# Altium PCB PCB_soldeerstation.PcbDoc
Units mil, origin at the board's own origin, x right, y up, seen from the top; angles counter-clockwise.
Board outline 5600 x 6050 mil, 2 copper layers (Top Layer, Bottom Layer); 76 components, 77 nets, 284 pads, 15 vias.
Unrouted connection lines stored in the file: 1.
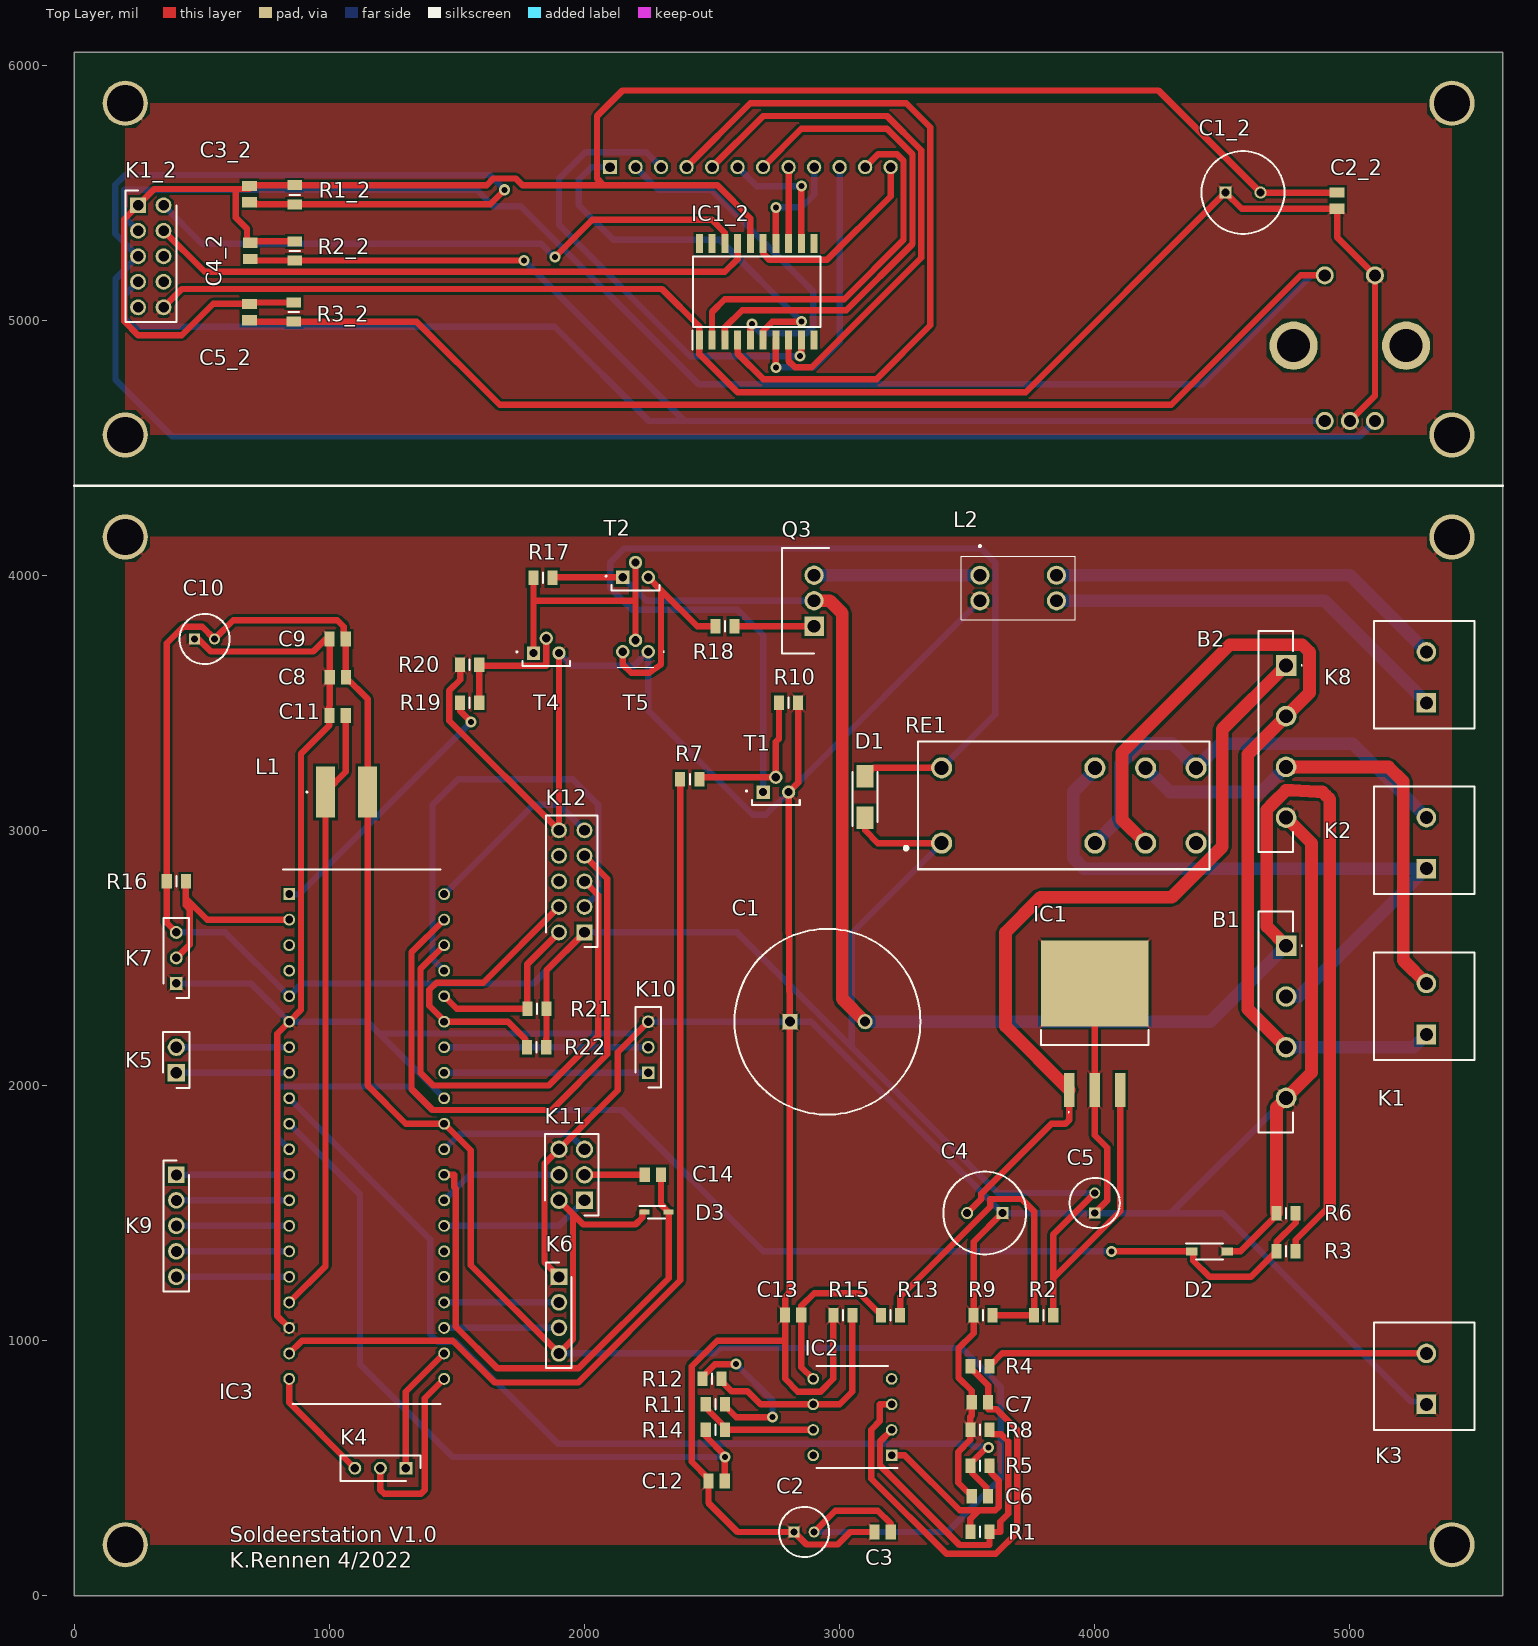
[diagram p0: Top Layer view]
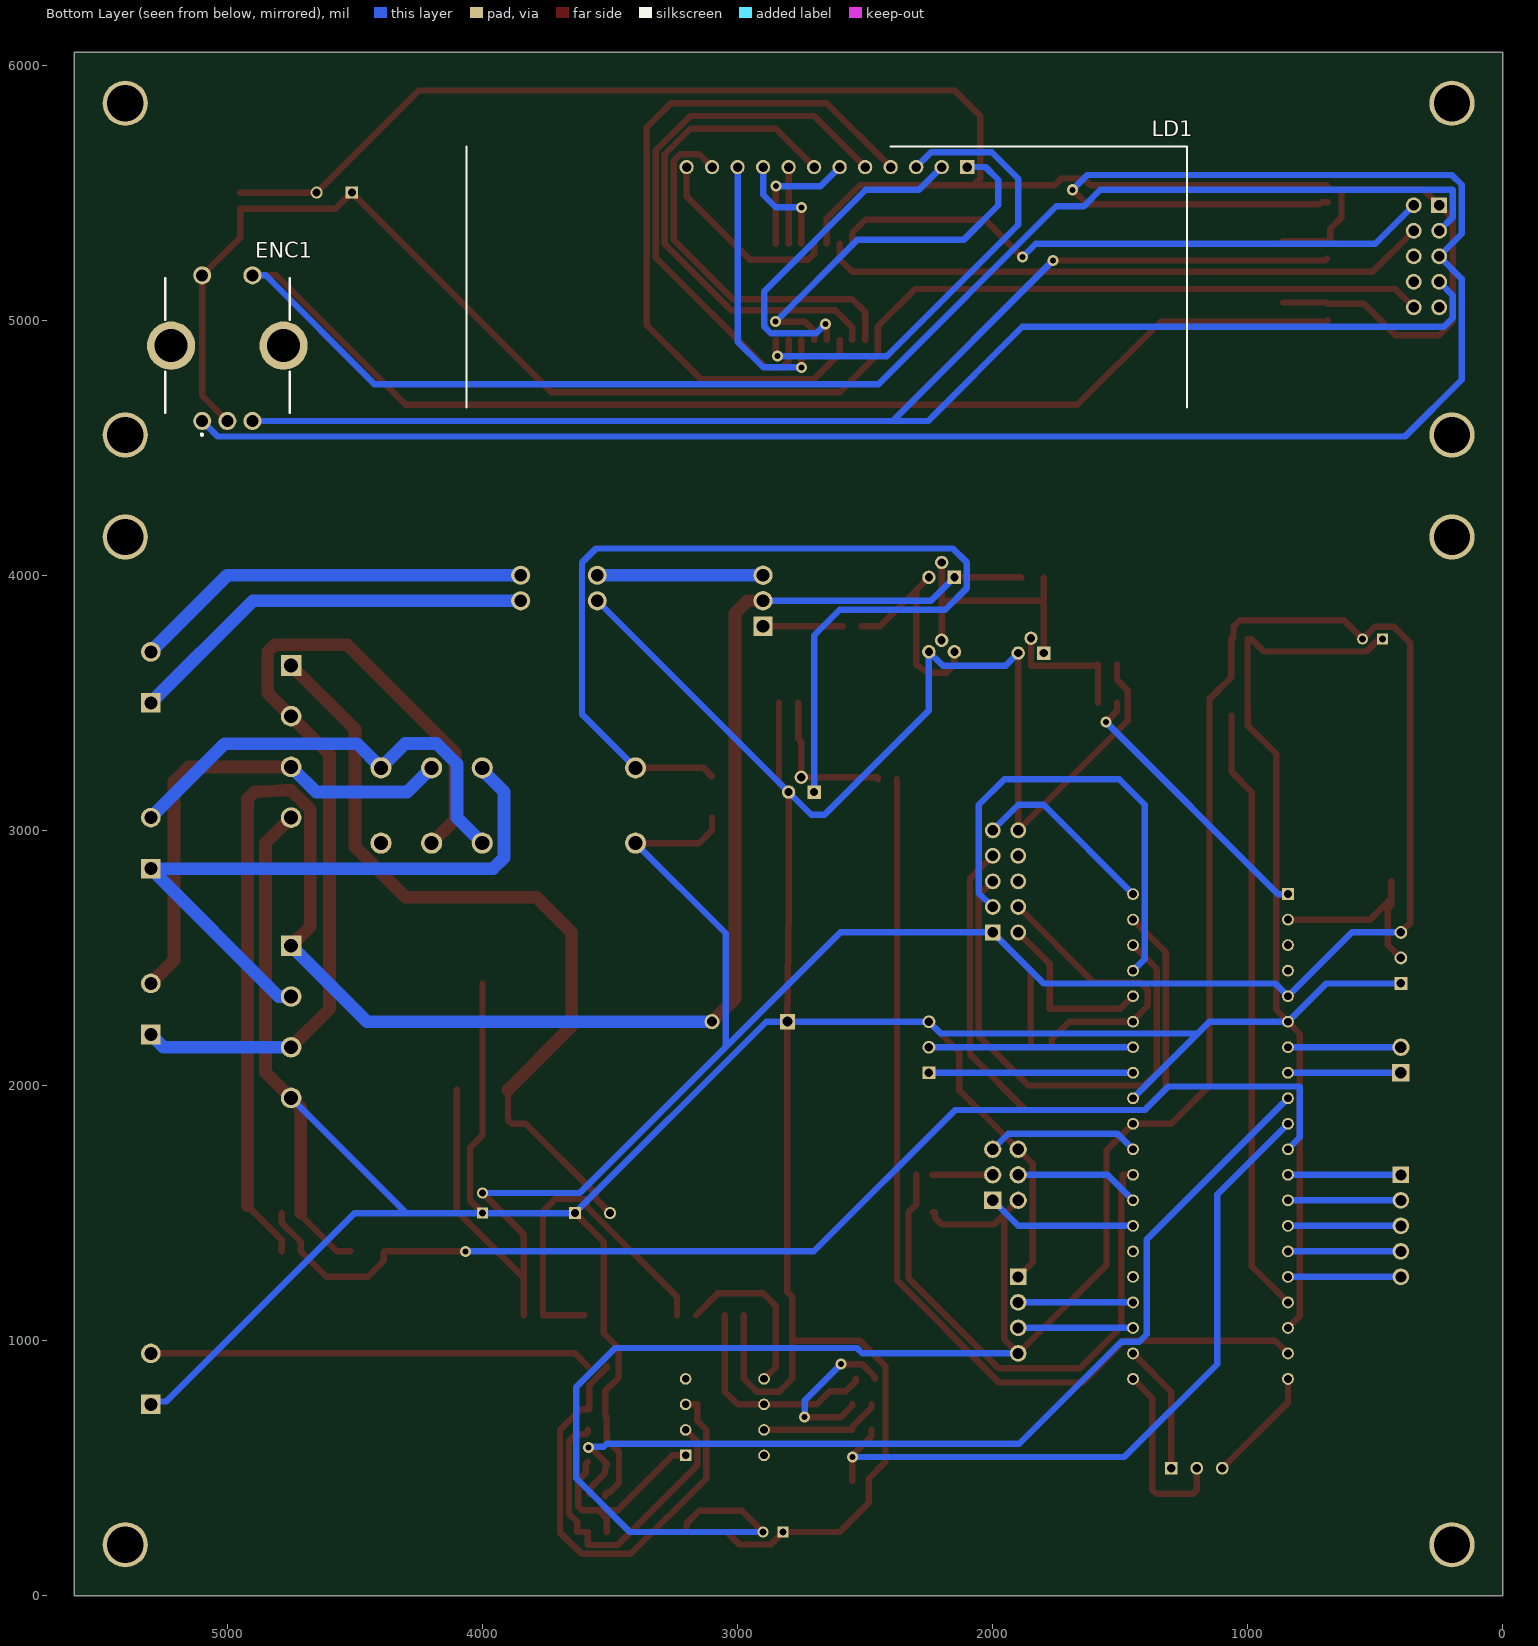
[diagram p1: Bottom Layer view, seen from below]
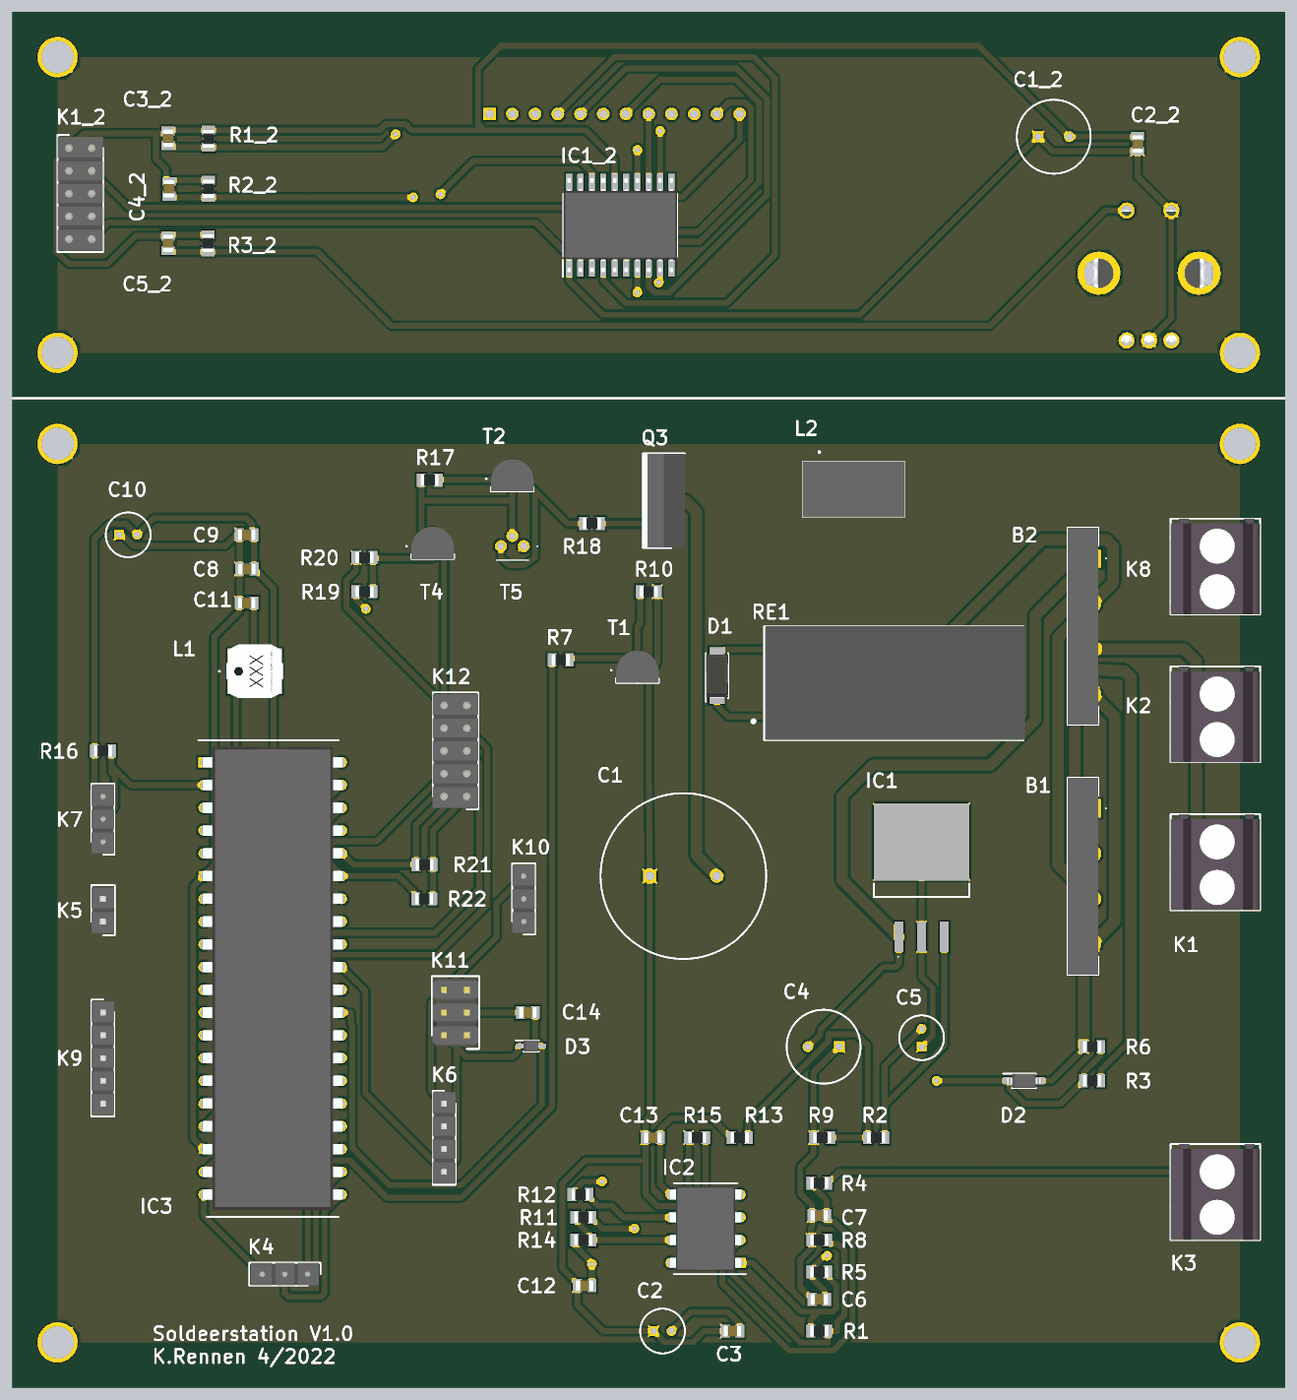
[diagram p2: 3D render of the assembled board from above, using the file's embedded part models]

## Layer stack, top to bottom
Top Solder: solder mask 0.4, Solder Resist, Dk 3.5
Top Layer: signal copper 1.4
Dielectric 1: dielectric 12.6, FR-4, Dk 4.8
Bottom Layer: signal copper 1.4
Bottom Solder: solder mask 0.4, Solder Resist, Dk 3.5

## Board outline
0,0 0,6050 5600,6050 5600,0

## Design rules (kind name [scope] priority, off if disabled: settings)
Clearance [All] p1: gap=10 ignorepadtopadclearanceinfootprint=FALSE except(0: Arc-Hole Track-Hole SMDPad-Hole THPad-Hole Via-Hole Fill-Hole Poly-Hole Region-Hole Text-Hole)
Height [All] p1 off: minheight=0 maxheight=1000 prefheight=500
PolygonConnect [All] p1: connectstyle=Relief reliefconductorwidth=10 reliefentries=4 polygonreliefangle="45 Angle" airgapwidth=10
RoutingVias [All] p1: holewidth=23.62 width=43.31 viastyle="Through Hole" minholewidth=23.62 minwidth=43.31 maxholewidth=23.62 maxwidth=43.31
SolderMaskExpansion [All] p1: expansion=4 istentingtop=FALSE
Width [All] p1: maxlimit=50 minlimit=25 preferedwidth=25 minimp=50.000000 maximp=50.000000 favimp=50.000000
29 further rules are at their usual default settings.

## Components (designator, comment, footprint, x,y, rotation, side; value= is the part's Value field where it differs from the comment)
B1 "bruggelijkrichter" GBU606G 4750,2547.64 r90 top
B2 "bruggelijkrichter" GBU606G 4750,3646.46 r90 top
C1 "4700uF" 4700uf 2804.72,2250 r0 top
C1_2 "100uF" 100uf 4512.2,5500 r0 top
C2 "10uF" 10uf 2821.26,250 r0 top
C2_2 "100nF" 100nF 4950,5468.11 r90 top
C3 "100nF" 100nF 3168.11,250 r0 top
C3_2 "10nF" 10nF 686.56,5493.49 r90 top
C4 "100uF" 100uf 3637.8,1500 r180 top
C4_2 "10nF" 10nF 690.21,5271.07 r90 top
C5 "10uF" 10uf 4000,1500 r90 top
C5_2 "10nF" 10nF 686.56,5031.65 r90 top
C6 "10nF" 10nF 3550,389.6 r0 top
C7 "10nF" 10nF 3550,758.24 r0 top
C8 "100nF" 100nF 1032.95,3600.11 r0 top
C9 "100nF" 100nF 1031.89,3750 r0 top
C10 "10uF" 10uf 471.26,3750 r0 top
C11 "100nF" 100nF 1031.89,3450 r0 top
C12 "10nF" 10nF 2518.11,450 r0 top
C13 "10nF" 10nF 2818.11,1100 r0 top
C14 "100nF" 100nF 2268.11,1650 r0 top
D1 "FM4007W-W" fm4007 3100,3130.71 r90 top
D2 "MMSZ4689T1G zener" mmsz4 4450,1350 r0 top
D3 "SMMDL914T1G" smmdl914 2282.75,1503.28 r0 top
ENC1 "PEC11R-4225F-S0024 encoder" PEC11R-4225F-S0024 5000,4900 r180 bottom
IC1 "TL780-05CKTTR" TL78005CKTTR 4000,2248.23 r0 top net-tie
IC1_2 "TM1637" tm1637 2675,5111.02 r90 top
IC2 "MCP6002-E_P dual opamp" mcp6002 3050,700 r180 top
IC3 "ATMEGA4809-PF" ATMEGA4809-PF 1146.26,1800 r0 top
K1 "schroefconnector" schroefconnector 5300,2200 r90 top
K1_2 "10 boxheader" 10BoxHeader 250,5450 r270 top
K2 "schroefconnector" schroefconnector 5300,2850 r90 top
K3 "schroefconnector" schroefconnector 5300,750 r90 top
K4 "1x3header" HDR1X3 1300,500 r180 top
K5 "1x2header" HDR1X2 400,2050 r90 top
K6 "1x4header" HDR1X4 1900,1250 r270 top
K7 "1x3header" HDR1X3 400,2400 r90 top
K8 "schroefconnector" schroefconnector 5300,3500 r90 top
K9 "1x5header" HDR1X5 400,1650 r270 top
K10 "1x3header" HDR1X3 2250,2050 r90 top
K11 "2x3header" HDR2X3 2000,1550 r90 top
K12 "10 boxheader" 10BoxHeader 2000,2600 r90 top
L1 "smoorspoel" smoorspoel 1067.32,3150 r0 top
L2 "cmsmoorspoel" CMsmoorspoel 3550,4000 r270 top
LD1 "KW4-804CVB" kw4 2400,5600 r270 bottom
Q3 "IRF9Z34NPBF" irf9z34npbf 2900,3800 r90 top
R1 "18k" 18k 3550,250 r0 top
R1_2 "10k" 10k 863.73,5491.39 r90 top
R2 "1M" 1M 3800,1100 r0 top
R2_2 "10k" 10k 863.73,5271.07 r90 top
R3 "68k" 68k 4750,1350 r0 top
R3_2 "10k" 10k 861.02,5031.65 r90 top
R4 "5k6" 5k6 3550,900 r0 top
R5 "5k6" 5k6 3550,509.3 r0 top
R6 "10k" 10k 4750,1500 r0 top
R7 "10k" 10k 2412.6,3200 r0 top
R8 "100E" 100ohm 3550,650 r0 top
R9 "10M" 10M 3562.6,1100 r0 top
R10 "4k7" 4k7 2800,3500 r0 top
R11 "18k" 18k 2512.6,750 r0 top
R12 "18k" 18k 2500,850 r0 top
R13 "5k6" 5k6 3200,1100 r0 top
R14 "5k6" 5k6 2512.6,650 r0 top
R15 "100E" 100ohm 3012.6,1100 r0 top
R16 "4k7" 4k7 400,2800 r180 top
R17 "4k7" 4k7 1836.64,3990.28 r0 top
R18 "100E" 100ohm 2550,3800 r0 top
R19 "10k" 10k 1550,3500 r0 top
R20 "4k7" 4k7 1550,3650 r0 top
R21 "4k7" 4k7 1813.74,2300.36 r0 top
R22 "4k7" 4k7 1812.6,2150 r0 top
RE1 "RT424005 relais" RT42005 3400,3097.64 r0 top
T1 "BC547" BC547CBU 2700,3155 r0 top
T2 "BC547" BC547CBU 2150,3996.85 r0 top
T4 "BC547" BC547CBU 1800,3700 r0 top
T5 "BC557" BC557C 2250,3700 r180 top

## Footprints (in the part's own frame and the unit in brackets; to place one, negate y for a bottom-side part, rotate by r counter-clockwise, add the part's x,y. Pads: shape width x height; smd on the part's side, far side on the other; paste and mask are expansions set on the pad)
1M [mm]
  rect 1x1.45 smd: 1(-0.95,0) 2(0.95,0)
  silkscreen extent 0,-0.53 0,0.53, body extent -1,-0.63 1,0.63, height 0.65
4k7 [mm]
  rect 1x1.45 smd: 1(-0.95,0) 2(0.95,0)
  silkscreen extent 0,-0.53 0,0.53, body extent -1,-0.63 1,0.63, height 0.65
5k6 [mm]
  rect 1x1.45 smd: 1(-0.95,0) 2(0.95,0)
  silkscreen extent 0,-0.53 0,0.53, body extent -1,-0.63 1,0.63, height 0.65
10BoxHeader [mm]
  rect 1.575x1.575 hole 1.05: 1(0,0)
  round 1.575 hole 1.05: 2(0,2.54) 3(2.54,0) 4(2.54,2.54) 5(5.08,0) 6(5.08,2.54) 7(7.62,0) 8(7.62,2.54) 9(10.16,0) 10(10.16,2.54)
  silkscreen extent -1.46,-1.27 11.62,3.81, body extent -1.27,-1.27 11.43,3.81, height 8.64
10k [mm]
  rect 1x1.45 smd: 1(-0.95,0) 2(0.95,0)
  silkscreen extent 0,-0.52 0,0.52, body extent -1,-0.63 1,0.63, height 0.65
10M [mm]
  rect 1x1.45 smd: 1(-0.95,0) 2(0.95,0)
  silkscreen extent 0,-0.53 0,0.53, body extent -1,-0.63 1,0.63, height 0.65
10nF [mm]
  rect 1.02x1.47 smd: 1(-0.81,0) 2(0.81,0)
  body extent -1,-0.63 1,0.63, height 0.94
10uf [mm]
  rect 1.1x1.1 hole 0.7: 1(0,0)
  round 1.1 hole 0.7: 2(2,0)
  silkscreen extent -1.5,-2.5 3.5,2.5
18k [mm]
  rect 1x1.45 smd: 1(-0.95,0) 2(0.95,0)
  silkscreen extent 0,-0.53 0,0.53, body extent -1,-0.63 1,0.63, height 0.65
68k [mm]
  rect 1x1.45 smd: 1(-0.95,0) 2(0.95,0)
  silkscreen extent 0,-0.53 0,0.53, body extent -1,-0.63 1,0.63, height 0.65
100nF [mm]
  rect 1.02x1.47 smd: 1(-0.81,0) 2(0.81,0)
  body extent -1,-0.63 1,0.63, height 0.94
100ohm [mm]
  rect 1x1.45 smd: 1(-0.95,0) 2(0.95,0)
  silkscreen extent 0,-0.53 0,0.53, body extent -1,-0.63 1,0.63, height 0.65
100uf [mm]
  rect 1.2x1.2 hole 0.8: 1(0,0)
  round 1.2 hole 0.8: 2(3.5,0)
  silkscreen extent -2.38,-4.12 5.87,4.12
4700uf [mm]
  rect 1.5x1.5 hole 1: 1(0,0)
  round 1.5 hole 1: 2(7.5,0)
  silkscreen extent -5.5,-9.25 13,9.25
ATMEGA4809-PF [mm]
  rect 1.184x1.184 hole 0.784: 1(-7.715,24.13)
  round 1.184 hole 0.784: 2(-7.715,21.59) 3(-7.715,19.05) 4(-7.715,16.51) 5(-7.715,13.97) 6(-7.715,11.43) 7(-7.715,8.89) 8(-7.715,6.35) 9(-7.715,3.81) 10(-7.715,1.27) 11(-7.715,-1.27) 12(-7.715,-3.81) 13(-7.715,-6.35) 14(-7.715,-8.89) 15(-7.715,-11.43) 16(-7.715,-13.97) 17(-7.715,-16.51) 18(-7.715,-19.05) 19(-7.715,-21.59) 20(-7.715,-24.13) 21(7.715,-24.13) 22(7.715,-21.59) 23(7.715,-19.05) 24(7.715,-16.51) 25(7.715,-13.97) 26(7.715,-11.43) 27(7.715,-8.89) 28(7.715,-6.35) 29(7.715,-3.81) 30(7.715,-1.27) 31(7.715,1.27) 32(7.715,3.81) 33(7.715,6.35) 34(7.715,8.89) 35(7.715,11.43) 36(7.715,13.97) 37(7.715,16.51) 38(7.715,19.05) 39(7.715,21.59) 40(7.715,24.13)
  silkscreen extent -8.31,-26.61 7.37,26.61, body extent -7.86,-25.88 7.86,25.88, height 6.35
BC547CBU [mm]
  rect 1.333x1.333 hole 0.82: 1(0,-0.127)
  round 1.333 hole 0.82: 2(1.27,1.35) 3(2.54,-0.127)
  silkscreen extent -1.7,-1.43 3.65,0.05, body extent -1.11,-1.43 3.65,2.19, height 5.43
BC557C [mm]
  round 1.35 hole 0.81: 1(0,0) 2(1.27,-1.143) 3(2.54,0)
  silkscreen extent -1.6,-0.05 3.07,1.55
CMsmoorspoel [mil]
  round 75 hole 50: 1(0,0) 2(100,0) 3(100,300) 4(0,300)
  silkscreen extent -118,-74 174,374, body extent -74,-74 174,374, height 378
fm4007 [mm]
  rect 2.25x1.7 smd: 1(-2.05,0) 2(2.05,0)
  silkscreen extent -2.9,-1.24 2.5,1.24, body extent -2.5,-1.24 2.5,1.24, height 2.31
GBU606G [mm]
  rect 2.055x2.055 hole 1.37: 1(0,0)
  round 2.055 hole 1.37: 2(-5.05,0) 3(-10.1,0) 4(-15.15,0)
  silkscreen extent -18.58,-1.6 3.42,2.75, body extent -18.57,-0.69 3.43,2.76, height 21.05
HDR1X2 [mm]
  rect 1.725x1.725 hole 1.15: 1(0,0)
  round 1.725 hole 1.15: 2(2.54,0)
  silkscreen extent -1.52,-1.32 4.06,1.32, body extent -1.27,-1.27 3.81,1.27, height 8.74
HDR1X3 [mm]
  rect 1.275x1.275 hole 0.85: 1(0,0)
  round 1.275 hole 0.85: 2(2.54,0) 3(5.08,0)
  silkscreen extent -1.45,-1.27 6.53,1.27, body extent -1.27,-1.27 6.35,1.27, height 8.64
HDR1X4 [mm]
  rect 1.65x1.65 hole 1.1: 1(0,0)
  round 1.65 hole 1.1: 2(2.54,0) 3(5.08,0) 4(7.62,0)
  silkscreen extent -1.45,-1.27 9.07,1.27, body extent -1.27,-1.27 8.89,1.27, height 8.34
HDR1X5 [mm]
  rect 1.65x1.65 hole 1.1: 1(0,0)
  round 1.65 hole 1.1: 2(2.54,0) 3(5.08,0) 4(7.62,0) 5(10.16,0)
  silkscreen extent -1.45,-1.27 11.61,1.27, body extent -1.27,-1.27 11.43,1.27, height 8.64
HDR2X3 [mm]
  rect 1.725x1.725 hole 1.15: 1(0,0)
  round 1.725 hole 1.15: 2(0,2.54) 3(2.54,0) 4(2.54,2.54) 5(5.08,0) 6(5.08,2.54)
  silkscreen extent -1.52,-1.37 6.6,3.91, body extent -1.27,-1.27 6.35,3.81, height 8.38
irf9z34npbf [mm]
  rect 1.92x1.92 hole 1.28: 1(0,0)
  round 1.92 hole 1.28: 2(2.54,0) 3(5.08,0)
  silkscreen extent -2.73,-1.49 7.81,3.2, body extent -2.67,-1.5 7.75,3.19, height 18.84
kw4 [mm]
  rect 1.425x1.425 hole 0.95: 1(0,7.62)
  round 1.425 hole 0.95: 2(0,5.08) 3(0,2.54) 4(0,0) 5(0,-2.54) 6(0,-5.08) 7(0,-7.62) 8(0,-10.16) 9(0,-12.7) 10(0,-15.24) 11(0,-17.78) 12(0,-20.32)
  silkscreen extent -2.02,-42.23 23.93,29.53
mcp6002 [mm]
  rect 1.158x1.158 hole 0.758: 1(-3.905,3.81)
  round 1.158 hole 0.758: 2(-3.905,1.27) 3(-3.905,-1.27) 4(-3.905,-3.81) 5(3.905,-3.81) 6(3.905,-1.27) 7(3.905,1.27) 8(3.905,3.81)
  silkscreen extent -4.48,-5.08 3.56,5.08, body extent -4.04,-4.75 4.04,4.75, height 5.33
mmsz4 [mm]
  rect 1.15x0.8 smd: 1(-1.75,0) 2(1.75,0)
  silkscreen extent -2.33,-0.8 1.34,0.8, body extent -1.86,-0.8 1.86,0.8, height 1.35
PEC11R-4225F-S0024 [mm]
  round 1.8 hole 1.2: 1(-2.5,-7.5) 2(2.5,-7.5) 3(0,-7.5) 4(-2.5,7) 5(2.5,7)
  round 4.8 hole 3.28: 6(5.6,0) 7(-5.6,0)
  silkscreen extent -6.2,-8.95 6.2,6.7, body extent -7,-7.75 6.99,7.15, height 31.51
RT42005 [mm]
  round 2.1 hole 1.4: 1(0,-3.75) 2(15.26,-3.75) 3(20.3,-3.75) 4(25.34,-3.75) 5(25.34,3.75) 6(20.3,3.75) 7(15.26,3.75) 8(0,3.75)
  silkscreen extent -3.67,-6.35 26.65,6.35, body extent -2.21,-6.35 26.79,6.35, height 15.86
schroefconnector [mm]
  rect 1.95x1.95 hole 1.3: 1(0,0)
  round 1.95 hole 1.3: 2(5.08,0)
  silkscreen extent -2.54,-4.8 8.17,5.2, body extent -2.54,-4.8 8.17,5.2, height 13.8
smmdl914 [mm]
  rect 1x0.5 smd: 1(-1.2,0) 2(1.2,0)
  silkscreen extent -1.7,-0.62 0.85,0.63, body extent -1.25,-0.63 1.25,0.63, height 1.1
smoorspoel [mm]
  rect 1.9x5.1 smd: 1(-2.1,0) 2(2.1,0)
  silkscreen extent -4,-0.05 -3.9,0.05, body extent -3.15,-3 3.15,3, height 4.5
TL78005CKTTR [mm]
  rect 1x3.4 smd: 1(-2.54,-6.745) 2(0,-6.745) 3(2.54,-6.745)
  rect 10.7x8.6 smd: 4(0,3.855)
  silkscreen extent -5.33,-9 5.33,-0.8
tm1637 [mm]
  rect 1.9x0.7 smd: 1(-4.8,5.715) 2(-4.8,4.445) 3(-4.8,3.175) 4(-4.8,1.905) 5(-4.8,0.635) 6(-4.8,-0.635) 7(-4.8,-1.905) 8(-4.8,-3.175) 9(-4.8,-4.445) 10(-4.8,-5.715) 11(4.8,-5.715) 12(4.8,-4.445) 13(4.8,-3.175) 14(4.8,-1.905) 15(4.8,-0.635) 16(4.8,0.635) 17(4.8,1.905) 18(4.8,3.175) 19(4.8,4.445) 20(4.8,5.715)
  silkscreen extent -5.75,-6.35 3.5,6.42, body extent -5.23,-6.35 5.23,6.35, height 2.8

## Part data
B1 B2: "Bridge Rectifier GBU606-G", Manufacturer_Name="Comchip Technology", Manufacturer_Part_Number=GBU606-G, Datasheet Link=https://www.comchiptech.com/product.php?id=2217, Height=20.95mm
C1: "Capacitor Polarised 50PK4700MEFC18X40", Manufacturer_Name=Rubycon, Manufacturer_Part_Number=50PK4700MEFC18X40, Mouser2 Part Number=232-50PK4700MEFC18X4, Datasheet Link=https://componentsearchengine.com//50PK4700MEFC18X40.pdf, Height=41.5mm, Mouser2 Price/Stock=https://www.mouser.com/Search/Refine.aspx?Keyword=232-50PK4700MEFC18X4
C1_2 C4: "Capacitor Polarised RGA101M1HBK-0811G", Manufacturer_Name=Lelon, Manufacturer_Part_Number=RGA101M1HBK-0811G, Datasheet Link=https://www.arrow.com/en/products/rga101m1hbk-0811g/lelon-electronics, Height=13mm
C2 C5 C10: "Capacitor Polarised 860020672010", Manufacturer_Name="Wurth Elektronik", Manufacturer_Part_Number=860020672010, Mouser2 Part Number=710-860020672010, Datasheet Link=https://componentsearchengine.com//860020672010.pdf, Height=12.5mm, Mouser2 Price/Stock=https://www.mouser.com/Search/Refine.aspx?Keyword=710-860020672010
C2_2 C3 C3_2 C4_2 C5_2 C6 C7 C8 C9 C11 C12 C13 C14: "Capacitor", Manufacturer_Name=AVX, Manufacturer_Part_Number=0402YC104MAT2A, Mouser Part Number=581-0402YC104MAT2A, Datasheet Link=http://www.mouser.com/catalog/supplier/library/pdf/AVXSurfaceMountCeramic.pdf, Height=0.56mm, Mouser Price/Stock=https://www.mouser.co.uk/ProductDetail/AVX/0402YC104MAT2A?qs=O2%2FeDh0sX9yiCaLwpXy1bw%3D%3D
D1: "Bridge Rectifier", Manufacturer_Name=Rectron, Mouser2 Part Number=583-FM4007W-W, Datasheet Link=https://componentsearchengine.com//FM4007W-W.pdf, Height=2.31mm, Manufacturer_Part_Number=FM4007W-W, Mouser2 Price/Stock=https://www.mouser.com/Search/Refine.aspx?Keyword=583-FM4007W-W
D2: "Zener Diode", Manufacturer_Name="ON Semiconductor", Manufacturer_Part_Number=MMSZ4689T1G, Mouser2 Part Number=863-MMSZ4689T1G, Datasheet Link=https://componentsearchengine.com//MMSZ4689T1G.pdf, Height=1.35mm, Mouser2 Price/Stock=https://www.mouser.com/Search/Refine.aspx?Keyword=863-MMSZ4689T1G
D3: "Diode SMMDL914T1G", Manufacturer_Name="ON Semiconductor", Mouser2 Part Number=863-SMMDL914T1G, Datasheet Link=https://componentsearchengine.com//SMMDL914T1G.pdf, Height=1.1mm, Manufacturer_Part_Number=SMMDL914T1G, Mouser2 Price/Stock=https://www.mouser.com/Search/Refine.aspx?Keyword=863-SMMDL914T1G
ENC1: "draai encoder met drukknop", Arrow Part Number=PEC11R-4225F-S0024, Manufacturer_Name=Bourns, Mouser Part Number=652-PEC11R-4225F-S24, Arrow Price/Stock=https://www.arrow.com/en/products/pec11r-4225f-s0024/bourns?region=nac, Datasheet Link=https://componentsearchengine.com/Datasheets/1/PEC11R-4225F-S0024.pdf, Manufacturer_Part_Number=PEC11R-4225F-S0024, Mouser Price/Stock=https://www.mouser.co.uk/ProductDetail/Bourns/PEC11R-4225F-S0024?qs=Zq5ylnUbLm4N6UNkPX3pkQ%3D%3D
IC1: "Integrated Circuit spanningsregelaar", Manufacturer_Name="Texas Instruments", Datasheet Link=http://www.ti.com/general/docs/suppproductinfo.tsp?distId=26&gotoUrl=http%3A%2F%2Fwww.ti.com%2Flit%2Fgpn%2Ftl780, Height=5.08mm, Manufacturer_Part_Number=TL780-05CKTTR
IC1_2: library part TM1637__SOP_, "Integrated Circuit", Manufacturer_Name="TITAN MICRO ELECTRONICS", Manufacturer_Part_Number="TM1637 (SOP)", Datasheet Link=https://www.mcielectronics.cl/website_MCI/static/documents/Datasheet_TM1637.pdf, Height=2.8mm
IC2: "Integrated Circuit", Manufacturer_Name=Microchip, Manufacturer_Part_Number=MCP6002-E/P, Mouser2 Part Number=579-MCP6002-E/P, Datasheet Link=https://componentsearchengine.com//MCP6002-E_P.pdf, Height=5.334mm, Mouser2 Price/Stock=https://www.mouser.com/Search/Refine.aspx?Keyword=579-MCP6002-E%2FP
IC3: "Integrated Circuit", Manufacturer_Name=Microchip, Mouser Part Number=556-ATMEGA4809-PF, Datasheet Link=http://ww1.microchip.com/downloads/en/DeviceDoc/40-pin-Data-Sheet-megaAVR-0-series-DS40002104A.pdf, Height=6.35mm, Manufacturer_Part_Number=ATMEGA4809-PF, Mouser Price/Stock=https://www.mouser.co.uk/ProductDetail/Microchip-Technology-Atmel/ATMEGA4809-PF?qs=T3oQrply3y9UlpZbCygk%252BQ%3D%3D
K1 K2 K3 K8: "Connector 1716020000", Manufacturer_Name=Weidmuller, Manufacturer_Part_Number=1716020000, Datasheet Link=https://catalog.weidmueller.com/catalog/Start.do?ObjectID=1716020000&_ga=2.21797499.1716783809.1613378202-511725545.1613378202
K1_2 K12: "Connector", Arrow Part Number=0010897100, Manufacturer_Name=Molex, Mouser Part Number=N/A, Arrow Price/Stock=https://www.arrow.com/en/products/0010897100/molex?region=nac, Datasheet Link=http://www.molex.com/pdm_docs/sd/010897100_sd.pdf, Height=8.64mm, Manufacturer_Part_Number=0010897100, Mouser Price/Stock=https://www.mouser.co.uk/ProductDetail/Molex/0010897100?qs=PBcRNPEHKsqIDCZzUxhahw%3D%3D
K4 K7 K10: "Connector", Arrow Part Number=0022035035, Manufacturer_Name=Molex, Mouser Part Number=N/A, Arrow Price/Stock=https://www.arrow.com/en/products/0022035035/molex, Datasheet Link=https://www.molex.com/pdm_docs/sd/022035035_sd.pdf, Height=6.1mm, Manufacturer_Part_Number=0022035035, Mouser Price/Stock=https://www.mouser.co.uk/ProductDetail/Molex/0022035035?qs=PBcRNPEHKsp8%252BOnk6fhZPA%3D%3D
K5: "Connector", Arrow Part Number=0022232021, Manufacturer_Name=Molex, Mouser Part Number=N/A, Arrow Price/Stock=https://www.arrow.com/en/products/0022232021/molex?region=europe, Datasheet Link=https://www.molex.com/webdocs/datasheets/pdf/en-us//0022232021_PCB_HEADERS.pdf, Height=11.05mm, Manufacturer_Part_Number=0022232021, Mouser Price/Stock=https://www.mouser.co.uk/ProductDetail/Molex/0022232021?qs=PBcRNPEHKspVhuxYRaP9bQ%3D%3D
K6: "Connector", Arrow Part Number=0009652048, Manufacturer_Name=Molex, Mouser Part Number=N/A, Arrow Price/Stock=https://www.arrow.com/en/products/0009652048/molex?region=europe, Datasheet Link=https://www.molex.com/pdm_docs/sd/009652048_sd.pdf, Height=14.25mm, Manufacturer_Part_Number=0009652048, Mouser Price/Stock=https://www.mouser.co.uk/ProductDetail/Molex/0009652048?qs=PBcRNPEHKsr%252BMEGD33m%2F9w%3D%3D
K9: "Connector", Arrow Part Number=0353620550, Manufacturer_Name=Molex, Mouser Part Number=N/A, Arrow Price/Stock=https://www.arrow.com/en/products/0353620550/molex, Datasheet Link=https://www.molex.com/pdm_docs/sd/353620550_sd.pdf, Height=8.5mm, Manufacturer_Part_Number=0353620550, Mouser Price/Stock=https://www.mouser.com/Search/Refine.aspx?Keyword=N%2FA
K11: "Connector", Arrow Part Number=10129381-906002BLF, Manufacturer_Name=Amphenol, Mouser Part Number=649-1012938190602BLF, Arrow Price/Stock=https://www.arrow.com/en/products/10129381-906002blf/amphenol-fci?region=europe, Datasheet Link=https://componentsearchengine.com/Datasheets/1/10129381-906002BLF.pdf, Height=8.58mm, Manufacturer_Part_Number=10129381-906002BLF, Mouser Price/Stock=https://www.mouser.co.uk/ProductDetail/Amphenol-FCI/10129381-906002BLF?qs=DXv0QSHKF4zSKXKyBbBVMw%3D%3D
L1: "Inductor VLS6045EX-100M-H", Manufacturer_Name=TDK, Manufacturer_Part_Number=VLS6045EX-100M-H, Mouser2 Part Number=810-VLS6045EX-100M-H, Datasheet Link=https://componentsearchengine.com//VLS6045EX-100M-H.pdf, Mouser2 Price/Stock=https://www.mouser.com/Search/Refine.aspx?Keyword=810-VLS6045EX-100M-H
L2: "Transformer CM2545X171B-10", Manufacturer_Name="Laird Technologies", Manufacturer_Part_Number=CM2545X171B-10, Datasheet Link=https://datasheet.datasheetarchive.com/originals/dk/DKDS-7/122753.pdf, Height=9.5mm
LD1: "Display", Manufacturer_Name=Luckylight, Datasheet Link=https://www.tme.eu/Document/21b6c1f82a45ad996bb1bfe0c31af292/KW4-804XVB.pdf, Height=7.75mm, Manufacturer_Part_Number=KW4-804CVB
Q3: "MOSFET (P-Channel)", Manufacturer_Name=Infineon, Mouser2 Part Number=942-IRF9Z34NPBF, Datasheet Link=https://componentsearchengine.com//IRF9Z34NPBF.pdf, Height=4.69mm, Manufacturer_Part_Number=IRF9Z34NPBF, Mouser2 Price/Stock=https://www.mouser.com/Search/Refine.aspx?Keyword=942-IRF9Z34NPBF
R1 R1_2 R2 R2_2 R3 R3_2 R4 R5 R6 R7 R9 R10 R11 R12 R13 R14 R16 R17 R19 R20 R21 R22: "Resistor", Arrow Part Number=CPF0805B100RE1, Manufacturer_Name="TE Connectivity", Mouser Part Number=279-CPF0805B100RE1, Arrow Price/Stock=https://www.arrow.com/en/products/cpf0805b100re1/te-connectivity?region=nac, Datasheet Link=https://datasheet.datasheetarchive.com/originals/distributors/DKDS-21/401696.pdf, Height=0.65mm, Manufacturer_Part_Number=CPF0805B100RE1, Mouser Price/Stock=https://www.mouser.co.uk/ProductDetail/TE-Connectivity-Holsworthy/CPF0805B100RE1?qs=9ylKvqdyudkCWLPT1QvLZQ%3D%3D
R8 R15 R18: library part 100ohm, "Resistor", Arrow Part Number=CPF0805B100RE1, Manufacturer_Name="TE Connectivity", Mouser Part Number=279-CPF0805B100RE1, Arrow Price/Stock=https://www.arrow.com/en/products/cpf0805b100re1/te-connectivity?region=nac, Datasheet Link=https://datasheet.datasheetarchive.com/originals/distributors/DKDS-21/401696.pdf, Height=0.65mm, Manufacturer_Part_Number=CPF0805B100RE1, Mouser Price/Stock=https://www.mouser.co.uk/ProductDetail/TE-Connectivity-Holsworthy/CPF0805B100RE1?qs=9ylKvqdyudkCWLPT1QvLZQ%3D%3D
RE1: "Relay or Contactor", Manufacturer_Name="TE Connectivity", Manufacturer_Part_Number=RT424005, Mouser2 Part Number=655-RT424005, Datasheet Link=https://componentsearchengine.com//RT424005.pdf, Mouser2 Price/Stock=https://www.mouser.com/Search/Refine.aspx?Keyword=655-RT424005
T1 T2 T4: library part BC547CBU, "Transistor BJT NPN", Manufacturer_Name="ON Semiconductor", Datasheet Link=https://www.onsemi.com/pdf/datasheet/bc550-d.pdf, Height=5.33mm, Manufacturer_Part_Number=BC547CBU
T5: library part BC557C, "Transistor BJT PNP", Manufacturer_Name=NXP, Mouser Part Number=771-BC557C, Datasheet Link=http://uk.rs-online.com/web/p/products/1124775, Height=5.2mm, Manufacturer_Part_Number=BC557C, Mouser Price/Stock=https://www.mouser.co.uk/ProductDetail/NXP-Semiconductors/BC557C?qs=84A%2FDAdkstLO1yR4NjQrgg%3D%3D

## Free pads (board coordinates)
  round 177.17 hole 141.73: Mount1(200,200) Mount2(5400,200) Mount3(200,4150) Mount4(5400,4150) Mount5(200,4550) Mount6(5400,4550) Mount7(200,5850) Mount8(5400,5850)

## Via types
v1: diameter 43.31, hole 23.62, Top Layer to Bottom Layer, 15 vias

## Nets (pads, with @x,y where several pads share a name; then routed paths per layer and width w, separated by ;. In a path a pad name is that pad's centre, name@x,y a point inside that pad or via, vN(x,y) a via of type N, cw(c..) or ccw(c..) an arc to the next point about the centre after c; other vN are vias at no path point)
+5: C2.2 C3.2 C5.2 C8.2 C9.2 C10.2 D1.1 D3.1 IC1.3 IC3.5 IC3.31 K6.4 K7.3 K11.2 K12.1 L1.2 R2.2 R16.2 R21.2 R22.2 RE1.1 | length 17010.2
  Top Layer w25: K7.3 362.6,2637.4 R16.2 362.6,3733.6 427,3798 502,3798 C10.2 623,3823 1031.35,3823 1056.2,3798.15 1056.2,3757.58 C9.2 ; C9.2@1064.84,3749.2 C8.2 1150,3514.95 L1.2 1150,2000 1300,1850 IC3.31 1554,1746 1554,1296 K6.4 1955,1005 1955,1495 ; R22.2 1851.14,2226.14 R21.2 1851.14,2451.14 K12.1 ; K11.2 1955,1495 ; D3.1 2226,1503.28 2226,1481 2200,1455 1995,1455 1955,1495 ; C2.2 2983,333 3150,333 3200,283 C3.2 ; D1.1 3100,3000 3150,2950 RE1.1 ; R2.2 3837.4,1244 ; C5.2 3837.4,1416.14 3837.4,1244 ; IC1.3 4100,1506.6 3837.4,1244
  Bottom Layer w25: K7.3 592.52,2600 IC3.5 892.52,2400 1800,2400 K12.1 2598,2600 3047,2151 ; K6.4 2511,950 2532.06,971.06 3478.94,971.06 3632,818 3632,460 3422,250 C2.2 ; RE1.1 3047,2597 3047,2151 ; C5.2 3619.26,1578.74 3047,2151
+5-Display: C1_2.2 C2_2.2 C3_2.2 C4_2.2 C5_2.2 IC1_2.16 K1_2.1 R1_2.2 R2_2.2 R3_2.2 | length 7626.8
  Top Layer w25: C3_2.2@685.24,5514.23 633,5514.23 ; C5_2.2 692.07,5069.05 R3_2.2 ; C5_2.2@686.56,5064.86 544.86,5064.86 421,4941 250,4941 196,4995 196,5396 K1_2.1 314.23,5514.23 633,5514.23 ; C4_2.2@686.56,5308.43 C4_2.2@694.14,5300.85 ; C4_2.2@686.56,5312.01 677,5312.01 677,5358 633,5402 633,5514.23 ; C3_2.2 689.97,5528.8 R1_2.2 1616.49,5528.8 1642.85,5555.15 1730.67,5555.15 1757.03,5528.8 2075,5528.8 ; C4_2.2 695.72,5308.47 R2_2.2 ; IC1_2.16 2650,5400 2521.2,5528.8 2075,5528.8 ; C2_2.2 C1_2.2 4250,5900 2149,5900 2049,5800 2049,5555 2075,5528.8
GND: B1.4 B2.4 C1.1 C2.1 C3.1 C4.1 C5.1 C6.1 C7.1 C8.1 C9.1 C10.1 C11.1 C12.1 C13.1 D2.2 IC1.2 IC1.4 IC3.6 IC3.18 IC3.32 K3.1 K6.1 K7.1 K10.3 K11.6 K12.10 L2.2 pad.Mount1 pad.Mount2 pad.Mount3 pad.Mount4 R6.1 R8.1 R9.1 R10.2 R15.1 R20.1 T1.3 T4.3 T5.1 | length 24114.5
  Top Layer w25: C10.1 486,3750 535,3701 937.22,3701 C9.1@986.22,3750 ; IC3.18 796,1096.52 796,2203.48 IC3.6 889,2296.48 889,3300 1000,3411 C11.1 1001.06,3526.06 C8.1 C9.1@1001.06,3748.94 ; R20.1 1512.6,3591 1470,3548.4 1470,3430 K12.10 T4.3 ; K6.1 1843,1307 1843,1693 K11.6 2130.75,1980.75 2130.75,2130.75 K10.3 ; R10.2 2837.4,3187.4 T1.3 2800,2704.72 C1.1 2804.72,1190.72 2786.22,1172.22 C13.1 2786.22,1000 ; R15.1 2975.2,850.2 2925,800 2836.22,800 2786.22,850 2786.22,1000 ; C3.1 3042,250 2993,201 2870.26,201 C2.1 2600,250 2486.22,363.78 C12.1 2486.22,459 2420,525.22 2420,900 2520,1000 2786.22,1000 ; C6.1 3518.11,398.46 3510.53,406.04 3501.67,406.04 3465,442.71 3465,563.4 3512.6,611 R8.1 3512.6,701 3518.11,706.51 C7.1 3518.11,803 3466,855.11 3466,970 3525.2,1029.2 R9.1 3525.2,1387.4 C4.1 ; C5.1 4049,1549 4049,1756 4000,1805 IC1.2 IC1.4 ; D2.2 4571.6,1350 4712.6,1491 R6.1
  Top Layer w50: R6.1 4712.6,1913.78 B1.4 4850,2051.18 4850,2950 B2.4
  Bottom Layer w25: K7.1 692.52,2400 IC3.6 1150,2250 1196,2204 ; IC3.32 1196,2204 ; T4.3 1949,3646 2196,3646 T5.1 2250,3470 2659,3061 2711,3061 T1.3 L2.2 ; B1.4 4298.82,1500 ; K3.1 5288.76,761.24 5238.76,761.24 4500,1500 4298.82,1500 ; 1196,2204 2204,2204 K10.3 C1.1 2887.8,2250 C4.1 C5.1 4298.82,1500
GND-Display: C1_2.1 C2_2.1 ENC1.3 ENC1.4 IC1_2.1 K1_2.10 pad.Mount5 pad.Mount6 pad.Mount7 pad.Mount8 | length 6145.9
  Top Layer w25: K1_2.10 422,5122 2304,5122 2450,4976 IC1_2.1 2450,4867 2600,4717 3729.2,4717 C1_2.1 4575.98,5436.22 C2_2.1 4950,5324.02 ENC1.4 5098.43,4703.15 ENC1.3
NetB1_2: B1.2 K2.1 RE1.7 | length 2547.6
  Bottom Layer w50: RE1.7 4000.79,3236.43 3915.56,3151.21 3915.56,2892.64 3958.2,2850 K2.1 4798.82,2348.82 B1.2
NetB1_3: B1.3 B2.2 K1.1 RE1.3 | length 3596.7
  Top Layer w50: RE1.3 4107.26,3041.96 4107.26,3304.69 4530.57,3728 4812.65,3728 4841.94,3698.71 4841.94,3539.57 B2.2 4600,3297.64 4600,2300 B1.3
  Bottom Layer w50: B1.3 5250,2150 K1.1
NetB2_1: B2.1 C4.2 IC1.1 | length 3204.7
  Top Layer w25: C4.2 3555.2,1555.2 3555.2,1575 3830.2,1850 3885.36,1850 3900,1864.64 IC1.1
  Top Layer w50: IC1.1 3650,2232.68 3650,2600 3788,2738 4302,2738 4500,2936 4500,3396.46 B2.1
NetB2_3: B2.3 K1.2 RE1.6 | length 1943.3
  Top Layer w50: B2.3 5152,3248.82 5209,3191.81 5209,2491 K1.2
  Bottom Layer w50: RE1.6 4294.49,3150 4651.18,3150 B2.3
NetC3_2_1: C3_2.1 ENC1.1 K1_2.5 R1_2.1 | length 8484.7
  Top Layer w25: C3_2.1 710.03,5461.6 717.64,5453.99 R1_2.1 1629.99,5453.99 v1(1687,5511)
  Bottom Layer w25: v1(1687,5511) 1629,5569 200,5569 161,5530 161,5339 K1_2.5 161.5,5161.5 161.5,4766.5 384,4544 5037.7,4544 ENC1.1
NetC4_2_1: C4_2.1 ENC1.2 K1_2.7 R2_2.1 | length 7001.4
  Top Layer w25: C4_2.1@690.35,5240.86 697.54,5233.67 R2_2.1 v1(1763.33,5233.67)
  Bottom Layer w25: K1_2.7 196.5,5096.5 196.5,5008.5 231,4974 1883.72,4974 2253,4604.72 2392.28,4604.72 ; v1(1763.33,5233.67) 2392.28,4604.72 ; ENC1.2 2392.28,4604.72
NetC5_2_1: C5_2.1 ENC1.5 K1_2.3 R3_2.1 | length 9944.8
  Top Layer w25: C5_2.1 692.07,4994.25 R3_2.1 1341.75,4994.25 1668,4668 4300,4668 4807.59,5175.59 ENC1.5
  Bottom Layer w25: K1_2.3 196,5404 196,5511 1577.81,5511 1642.36,5446.45 1750.55,5446.45 2449,4748 4422,4748 4849.59,5175.59 ENC1.5
NetC6_2: C6.2 IC3.9 R5.1 | length 3767.3
  Top Layer w25: R5.1@3511.86,514.14 3511.86,517.42 3571.18,576.74 3580.71,576.74 v1(3584.21,580.24) ; R5.1 3519.78,502.12 3519.78,480.22 3574.31,425.69 3574.31,406.04 3580.35,400 C6.2@3581.89,400
  Bottom Layer w25: IC3.9 1396,1396.52 1396,1025 1425,996 1496,996 1896,596 3512.56,596 3525.06,583.5 3580.95,583.5 v1(3584.21,580.24)
NetC7_2: C7.2 IC2.3 R4.1 | length 1827.9
  Top Layer w25: IC2.3 3158,750 3158,685.55 3123.44,650.99 3123.44,459.24 3418.73,163.96 3611.96,163.96 3696,248 3696,650 3615,731 3581.89,731 C7.2 3581.89,825.11 3512.6,894.4 R4.1
NetC11_2: C11.2 IC3.17 L1.1 | length 2391.6
  Top Layer w25: IC3.17 984.65,1292.13 L1.1 1063.78,3229.13 C11.2
NetC12_2: C12.2 IC3.10 R14.1 | length 2868.7
  Top Layer w25: R14.1 2475.2,624.8 2550,550 v1(2550,544) C12.2
  Bottom Layer w25: IC3.10 1120,1572.52 1120,908 1484,544 v1(2550,544)
NetC13_2: C13.2 IC2.5 R13.1 | length 674.1
  Top Layer w25: IC2.5 2850,896.26 C13.2 2850,1136 2900,1186 3076.6,1186 R13.1
NetC14_1: C14.1 K11.3 | length 236.2
  Top Layer w25: K11.3 C14.1
NetC14_2: C14.2 D3.2 IC3.29 | length 2104.1
  Top Layer w25: IC3.29 1490,1650 1490,1602 1496,1596 1496,1054 1659,891 1976,891 2330,1245 D3.2 2300,1533.27 C14.2
NetD1_2: D1.2 RE1.8 T1.1 | length 4150.9
  Top Layer w25: D1.2 3133.86,3245.28 RE1.8
  Bottom Layer w25: T1.1 2700,3765 2600,3865 2186,3865 2101,3950 2101,4050 2156,4105 3555,4105 3610,4050 3610,3455.28 RE1.8
NetD2_1: D2.1 IC3.11 R3.1 R6.2 | length 4732
  Top Layer w25: v1(4066,1350) 4383.01,1350 4386.26,1346.75 4386.26,1313.74 4450,1250 4612.6,1250 R3.1 4712.6,1387 4787.4,1461.8 R6.2
  Bottom Layer w25: IC3.11 796,1796.52 796,1995 797,1996 1312,1996 1404,1904 2147,1904 2701,1350 v1(4066,1350)
NetIC1_2_2: IC1_2.2 LD1.11 | length 1470.1
  Top Layer w25: IC1_2.2 2500,5032 2550,5082 3018,5082 3250.55,5314.55 3250.55,5625 3225,5650.55 3150.55,5650.55 LD1.11
NetIC1_2_3: IC1_2.3 LD1.7 | length 1960.7
  Top Layer w25: IC1_2.3 2550,4971 2617.71,5038.71 3025.61,5038.71 3285.55,5298.65 3285.55,5650 3185.55,5750 2850,5750 LD1.7
NetIC1_2_4: IC1_2.4 LD1.4 | length 2811.5
  Top Layer w25: LD1.4 2650,5850 3261.1,5850 3355.55,5755.55 3355.55,4979.55 3145,4769 2700,4769 2600,4869 IC1_2.4
NetIC1_2_5: IC1_2.5 LD1.2 | length 1366.3
  Top Layer w25: IC1_2.5 2650,4979 v1(2656,4985)
  Bottom Layer w25: LD1.2 2289,5511 2497,5511 2896,5112 2896,4975 2870,4949 2692,4949 v1(2656,4985)
NetIC1_2_6: IC1_2.6 LD1.1 | length 1506.5
  Top Layer w25: IC1_2.6 2700,4958 2736,4994 v1(2851,4994)
  Bottom Layer w25: LD1.1 2028,5600 1978,5550 1978,5450 2112.18,5315.82 2529.18,5315.82 v1(2851,4994)
NetIC1_2_7: IC1_2.7 LD1.10 | length 1083.8
  Top Layer w25: v1(2750,4814.85) IC1_2.7
  Bottom Layer w25: v1(2750,4814.85) 2900,4814.85 3000,4914.85 LD1.10
NetIC1_2_8: IC1_2.8 LD1.5 | length 2171.3
  Top Layer w25: LD1.5 2700,5800 3186,5800 3320.55,5665.45 3320.55,5244.65 2890.75,4814.85 2825,4814.85 2799.85,4840 2799.85,4904.15 2800,4904.15 IC1_2.8
NetIC1_2_9: IC1_2.9 LD1.3 | length 1870
  Top Layer w25: v1(2844,4859) 2850,4865 IC1_2.9
  Bottom Layer w25: LD1.3 2242,5658 2004,5658 1900,5554 1900,5374 2415,4859 v1(2844,4859)
NetIC1_2_12: IC1_2.12 LD1.6 | length 506.1
  Top Layer w25: IC1_2.12 v1(2850,5525)
  Bottom Layer w25: LD1.6 2675,5525 v1(2850,5525)
NetIC1_2_13: IC1_2.13 LD1.8 | length 300
  Top Layer w25: IC1_2.13 LD1.8
NetIC1_2_14: IC1_2.14 LD1.9 | length 420.7
  Top Layer w25: IC1_2.14 v1(2750,5442)
  Bottom Layer w25: v1(2750,5442) 2850,5442 2900,5492 LD1.9
NetIC1_2_15: IC1_2.15 LD1.12 | length 766.9
  Top Layer w25: IC1_2.15 2700,5261 2725,5236 2950,5236 3200,5486 LD1.12
NetIC1_2_17: IC1_2.17 K1_2.4 | length 2398.4
  Top Layer w25: K1_2.4 511,5189 2550,5189 2600,5239 IC1_2.17
NetIC1_2_18: IC1_2.18 K1_2.2 | length 2408.3
  Top Layer w25: v1(1884,5247) 2030,5393 2500,5393 2550,5343 IC1_2.18
  Bottom Layer w25: K1_2.2 500,5300 1831,5300 v1(1884,5247)
NetIC2_1: IC2.1 R1.1 R5.2 | length 805.9
  Top Layer w25: IC2.1 3255.74,550 3470.88,334.86 3546.46,334.86 ; R1.1 3512.73,250.13 3512.73,301.13 3546.46,334.86 ; R5.2@3586.66,524.9 3594.59,516.98 3594.59,480.91 3624.47,451.03 3624.47,425.53 3624.47,349.51 3609.83,334.86 3546.46,334.86
NetIC2_2: IC2.2 R1.2 R8.2 | length 1274.6
  Top Layer w25: IC2.2 3158.44,604.7 3158.44,510.51 3470,198.96 3587.4,198.96 R1.2 3629,250 3629,289.46 3660.68,321.14 3660.68,605.72 3634.12,632.28 3596.12,632.28 3587.4,641 R8.2
NetIC2_6: IC2.6 R12.2 R15.2 | length 880.6
  Top Layer w25: R12.2 2537.4,840 2576.4,801 2639,801 2690,750 IC2.6 3000,750 3050,800 R15.2
NetIC2_7: IC2.7 R11.1 R14.2 | length 477.2
  Top Layer w25: R11.1 2475.2,736.8 2550,662 R14.2 IC2.7
NetIC3_1: IC3.1 R19.1 | length 1086.3
  Top Layer w25: R19.1 1512.6,3468 v1(1556,3424.6)
  Bottom Layer w25: IC3.1 881.4,2750 v1(1556,3424.6)
NetIC3_2: IC3.2 K7.2 R16.1 | length 767.3
  Top Layer w25: K7.2 452,2552 452,2692 437.4,2706.6 437.4,2733.6 ; R16.1 437.4,2733.6 ; IC3.2 521,2650 437.4,2733.6
NetIC3_7: IC3.7 K5.2 | length 442.5
  Bottom Layer w25: K5.2 IC3.7
NetIC3_8: IC3.8 K5.1 | length 442.5
  Bottom Layer w25: K5.1 IC3.8
NetIC3_12: IC3.12 K9.1 | length 442.5
  Bottom Layer w25: K9.1 IC3.12
NetIC3_13: IC3.13 K9.2 | length 442.5
  Bottom Layer w25: K9.2 IC3.13
NetIC3_14: IC3.14 K9.3 | length 442.5
  Bottom Layer w25: K9.3 IC3.14
NetIC3_15: IC3.15 K9.4 | length 442.5
  Bottom Layer w25: K9.4 IC3.15
NetIC3_16: IC3.16 K9.5 | length 442.5
  Bottom Layer w25: K9.5 IC3.16
NetIC3_19: IC3.19 R7.1 | length 3750.9
  Top Layer w25: IC3.19 892.52,1000 1484,1000 1648,836 1975,836 2375.2,1236.2 R7.1
NetIC3_20: IC3.20 K4.3 | length 456.7
  Top Layer w25: IC3.20 842.52,757.48 K4.3
NetIC3_21: IC3.21 K4.2 | length 738.3
  Top Layer w25: K4.2 1200,414.64 1214.64,400 1359.36,400 1374,414.64 1374,774 IC3.21
NetIC3_22: IC3.22 K4.1 | length 512.1
  Top Layer w25: K4.1 1300,800 IC3.22
NetIC3_23: IC3.23 K6.3 | length 450
  Bottom Layer w25: IC3.23 K6.3
NetIC3_24: IC3.24 K6.2 | length 450
  Bottom Layer w25: IC3.24 K6.2
NetIC3_27: IC3.27 K11.1 | length 591.4
  Bottom Layer w25: IC3.27 1900,1450 K11.1
NetIC3_28: IC3.28 K11.4 | length 491.4
  Bottom Layer w25: IC3.28 1550,1650 K11.4
NetIC3_30: IC3.30 K11.5 | length 600.5
  Bottom Layer w25: IC3.30 1511,1811 1939,1811 K11.5
NetIC3_33: IC3.33 K10.1 | length 800
  Bottom Layer w25: IC3.33 K10.1
NetIC3_34: IC3.34 K10.2 | length 800
  Bottom Layer w25: IC3.34 K10.2
NetIC3_35: IC3.35 K12.4 R22.1 | length 1171.6
  Top Layer w25: IC3.35 1700,2250 1768.01,2181.99 1768.01,2157.19 R22.1 ; IC3.35@1452,2252 1392,2312 1392,2375 1420.16,2403.16 1603.16,2403.16 K12.4
NetIC3_36: IC3.36 K12.2 R21.1 | length 697.8
  Top Layer w25: IC3.36 1499.64,2300.36 R21.1 1776.34,2476.34 K12.2
NetIC3_37: IC3.37 K12.3 | length 1824.3
  Bottom Layer w25: IC3.37 1404,2496 1404,3100 1504,3200 1954,3200 2054,3100 2054,2754 K12.3
NetIC3_38: IC3.38 K12.5 | length 1965
  Top Layer w25: IC3.38 1357,2457 1357,2050 1407,2000 1860,2000 2054,2194 2054,2746 K12.5
NetIC3_39: IC3.39 K12.7 | length 2422.9
  Top Layer w25: IC3.39 1322,2522 1322,1986.19 1404,1904.19 1871.19,1904.19 2089,2122 2089,2811 K12.7
NetIC3_40: IC3.40 K12.9 | length 736.4
  Bottom Layer w25: IC3.40 1800,3100 1900,3100 K12.9
NetK2_2: K2.2 RE1.2 RE1.5 | length 1783.1
  Bottom Layer w50: RE1.2 4100,3049.21 4100,3260 4180.28,3340.28 4302.64,3340.28 RE1.5 4492.36,3340 5010,3340 K2.2
NetK3_2: K3.2 R4.2 | length 1733.3
  Top Layer w25: R4.2 3637.4,950 K3.2
NetK8_1: K8.1 L2.3 | length 1615.7
  Bottom Layer w50: L2.3 4900,3900 K8.1
NetK8_2: K8.2 L2.4 | length 1574.3
  Bottom Layer w50: L2.4 5000,4000 K8.2
NetL2_1: L2.1 Q3.3 | length 650
  Bottom Layer w50: Q3.3 L2.1
NetQ3_1: Q3.1 R18.2 | length 312.6
  Top Layer w25: R18.2 Q3.1
NetR2_1: R2.1 R9.2 R13.2 | length 1362.2
  Top Layer w25: R13.2 3237.4,1171.4 3591,1525 3591,1555 3714,1555 3762.6,1506.4 R2.1 R9.2
NetR7_2: R7.2 R10.1 T1.2 | length 605.2
  Top Layer w25: R7.2 2450,3208.15 T1.2 2750,3347 2762.6,3359.6 R10.1
NetR11_2: R11.2 R12.1 | length 638.7
  Top Layer w25: R12.1 2462.6,858.86 2510.43,906.69 2593.46,906.69 v1(2594.66,907.9) ; R11.2 2550,745 2595,700 v1(2737,700)
  Bottom Layer w25: v1(2594.66,907.9) 2737,765.56 v1(2737,700)
NetR17_1: R17.1 T2.2 T4.1 T5.2 | length 999.5
  Top Layer w25: T4.1 1800,3900 ; R17.1@1800,3989.52 1800,3900 ; T5.2 2200,3900 ; T2.2 2200,3900 ; 1800,3900 2200,3900
NetR18_1: R18.1 T2.3 T5.3 | length 857.7
  Top Layer w25: T5.3 2150,3650 2182.58,3617.42 2253.73,3617.42 2300,3650 2300,3941.85 ; T2.3 2300,3941.85 ; R18.1 2441.85,3800 2300,3941.85
NetR19_2: R19.2 R20.2 T4.2 | length 519.7
  Top Layer w25: R19.2 R20.2@1587.4,3646 ; R20.2 R20.2@1587.4,3646 ; T4.2 1850,3646 R20.2@1587.4,3646
VIN: B1.1 C1.2 Q3.2 R3.2 R17.2 T2.1 | length 7276.1
  Top Layer w25: R17.2@1887.15,3989.88 1889.12,3991.85 T2.1 ; R3.2 4787.4,1395 4921.23,1528.83
  Top Layer w50: Q3.2 2961,3900 3010,3851 3010,2340 C1.2 ; B1.1 4674.55,2623.09 4674.55,3081.25 4700,3106.71 4700,3107 4749.94,3156.94 4772.01,3156.94 4873.94,3151.41 4893.05,3150.38 4906.59,3136.84 4921.23,3122.2 4921.23,1528.83
  Bottom Layer w25: T2.1 2241.85,3900 Q3.2
  Bottom Layer w50: C1.2 4452.36,2250 B1.1
pads on no net: ENC1.6 ENC1.7 IC1_2.10 IC1_2.11 IC1_2.19 IC1_2.20 IC2.4 IC2.8 IC3.3 IC3.4 IC3.25 IC3.26 K1_2.6 K1_2.8 K1_2.9 K12.6 K12.8 RE1.4

## Polygon pours and split planes (outlines as drawn)
GND on Top Layer "GND_L01_P001" (solid, pour order 1): 200,4150 200,200 5400,200 5400,4150
GND-Display on Top Layer "GND-DISPLAY_L01_P000" (solid, pour order 0): 200,5850 5400,5850 5400,4550 200,4550

## Silkscreen, mask and mechanical layers (free items; w line width, h text height)
Top Overlay:
  lines w10: 0,4350 5600,4350
  text "Soldeerstation V1.0" at 610,210 h60
  text "K.Rennen 4/2022" at 610,110 h60
Board Outline:
  lines w10: 0,0 0,6050 0,5600